# Altium PCB PCB1.PcbDoc
Units mm, origin at the board's own origin, x right, y up, seen from the top; angles counter-clockwise.
Board outline 80 x 85 mm, 2 copper layers (Top Layer, Bottom Layer); 33 components, 43 nets, 169 pads, 2 vias.
Unrouted connection lines stored in the file: 99.
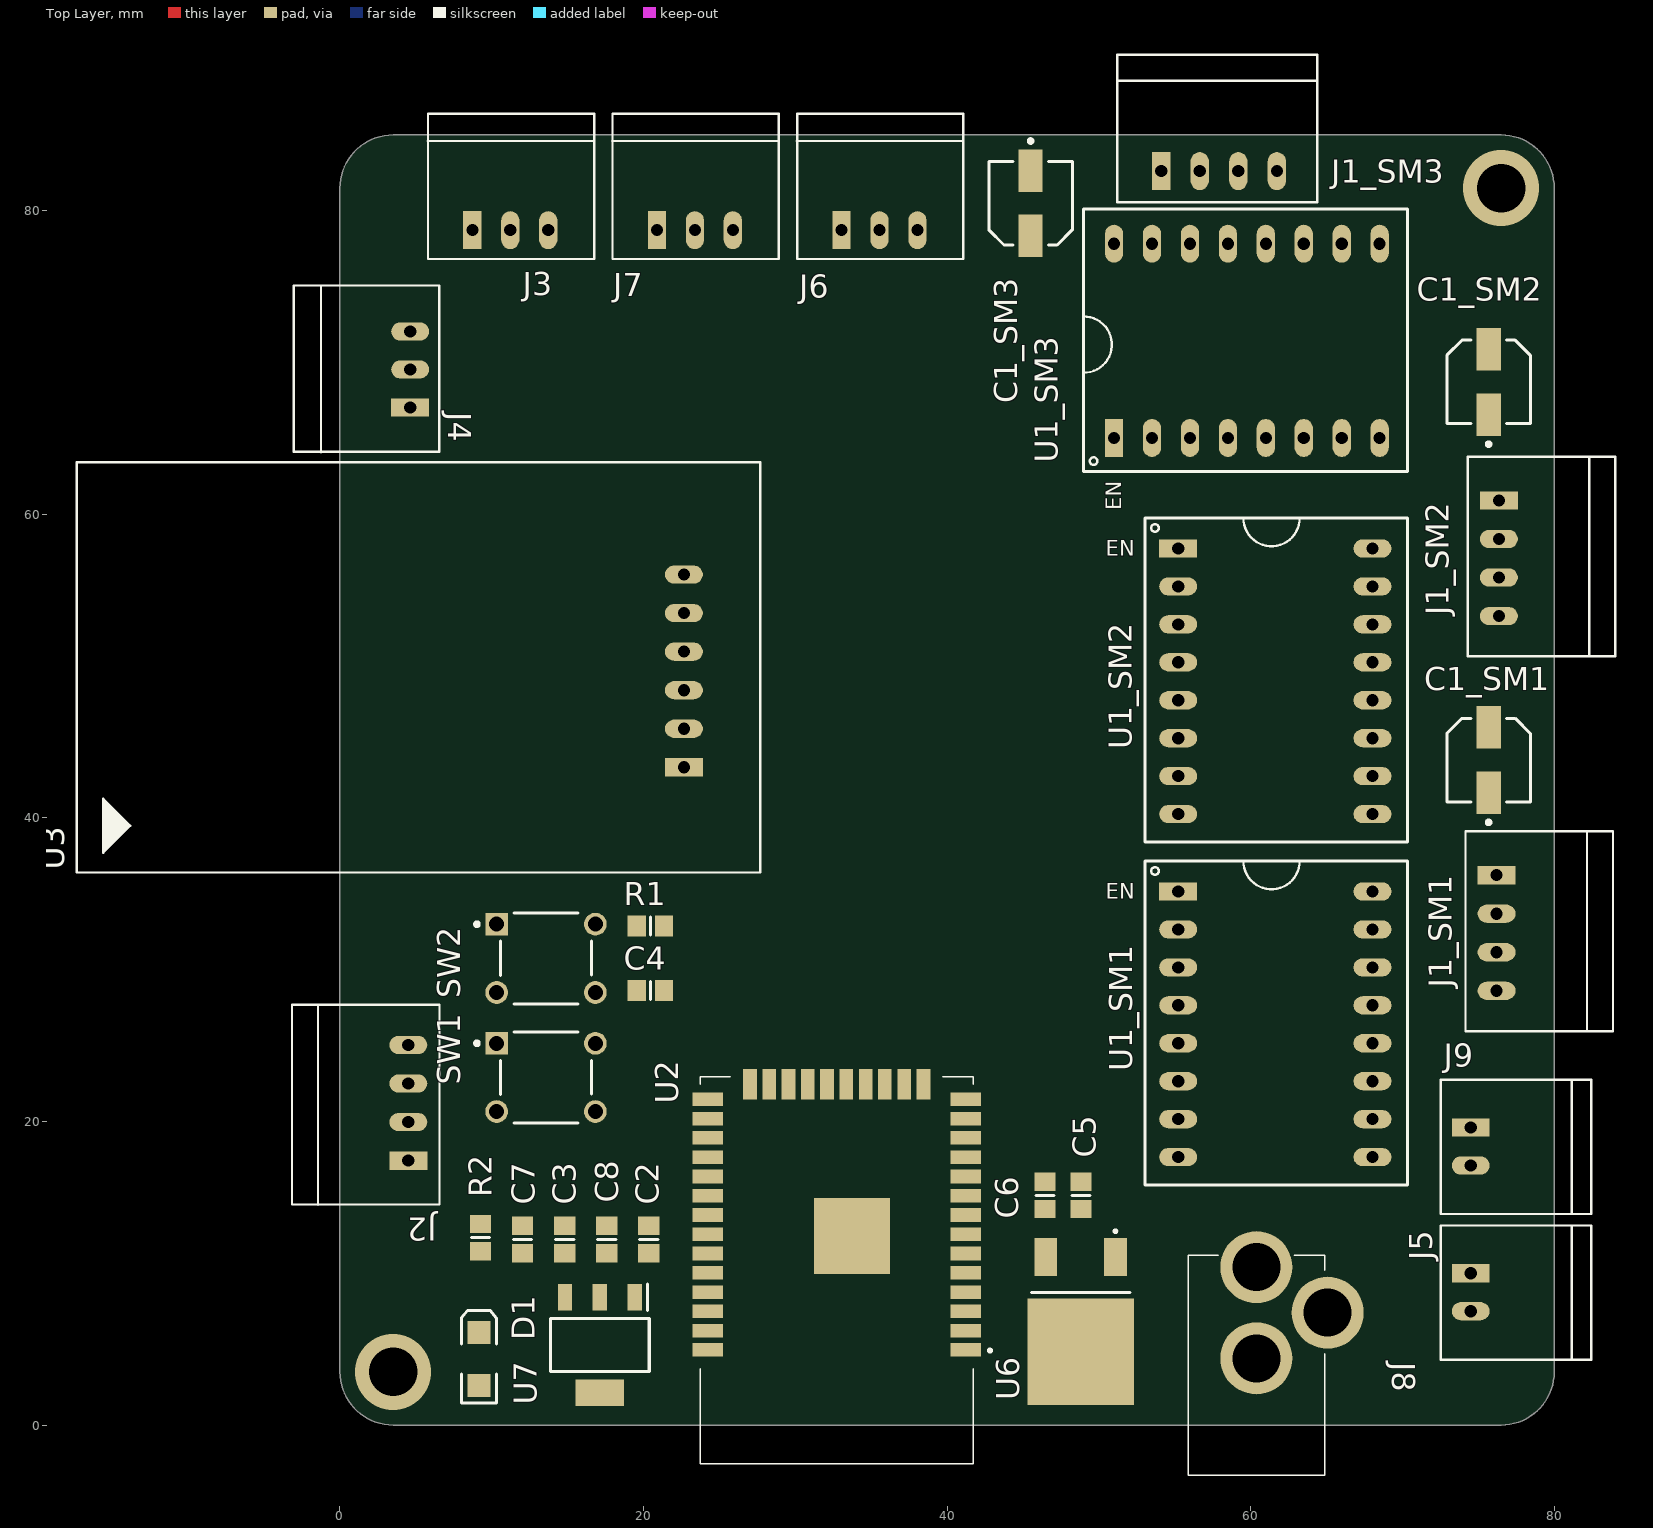
[diagram p0: Top Layer view]
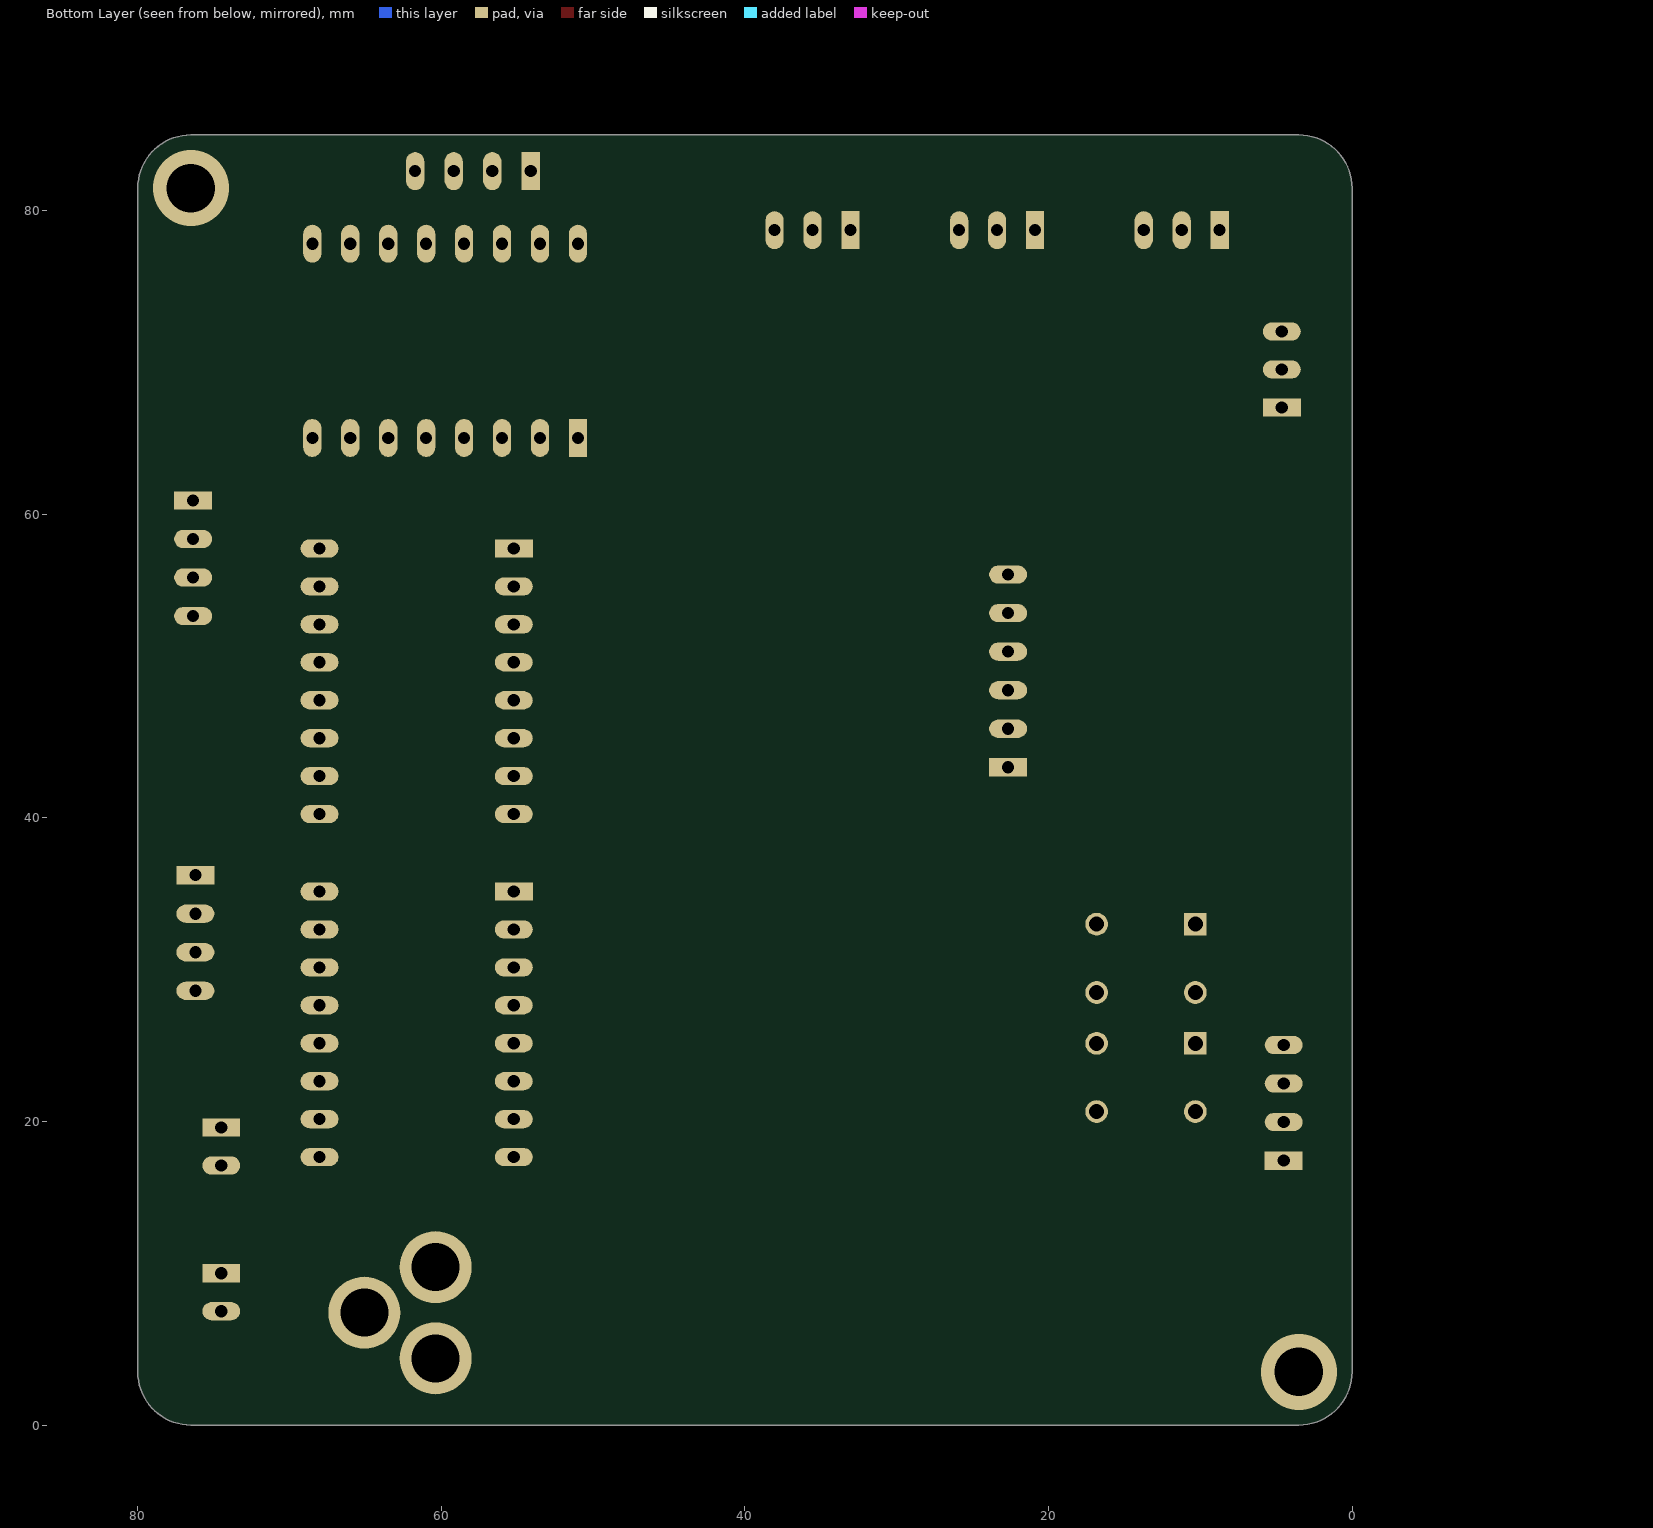
[diagram p1: Bottom Layer view, seen from below]

## Layer stack, top to bottom
Top Solder: solder mask 0.0102, Solder Resist, Dk 3.5
Top Layer: signal copper 0.0356
Dielectric 1: dielectric 0.32, FR-4, Dk 4.8
Bottom Layer: signal copper 0.0356
Bottom Solder: solder mask 0.0102, Solder Resist, Dk 3.5

## Board outline
0,3.5 0,81.5 cw(c3.5,81.5) 3.5,85 76.5,85 cw(c76.5,81.5) 80,81.5 80,3.5 cw(c76.5,3.5) 76.5,0 3.5,0 cw(c3.5,3.5)

## Design rules (kind name [scope] priority, off if disabled: settings)
Clearance [All] p1: gap=0.254 ignorepadtopadclearanceinfootprint=FALSE except(0: Arc-Hole Track-Hole SMDPad-Hole THPad-Hole Via-Hole Fill-Hole Poly-Hole Region-Hole Text-Hole)
PolygonConnect [All] p1: connectstyle=Relief reliefconductorwidth=0.254 reliefentries=4 polygonreliefangle="90 Angle" airgapwidth=0.254
RoutingVias [All] p1: holewidth=0.711 width=1.27 viastyle="Through Hole" minholewidth=0.711 minwidth=1.27 maxholewidth=0.711 maxwidth=1.27
SolderMaskExpansion [All] p1: expansion=0.102 istentingtop=FALSE
Width [All] p1: maxlimit=0.254 minlimit=0.254 preferedwidth=0.254
30 further rules are at their usual default settings.

## Classes and differential pairs
channel class SM1: SM1 SM2 SM3
component class SM3: C1_SM3 J1_SM3 U1_SM3
component class SM2: C1_SM2 J1_SM2 U1_SM2
component class Sheet: C2 C3 C4 C5 C6 C7 C8 D1 J2 J3 J4 J5 J6 J7 J8 J9 R1 R2 SW1 SW2 U2 U3 U6 U7
component class SM1: C1_SM1 J1_SM1 U1_SM1

## Components (designator, comment, footprint, x,y, rotation, side; value= is the part's Value field where it differs from the comment)
C1_SM1 "100pF" FP-SC-MFG 75.679,43.81 r90 top (schematic designator C1)
C1_SM2 "100pF" FP-SC-MFG 75.679,68.725 r90 top (schematic designator C1)
C1_SM3 "100pF" FP-SC-MFG 45.5,80.5 r270 top (schematic designator C1)
C2 "Cap Pol1" 6-0805_N 20.35,12.225 r90 top value=100pF
C3 "Cap Pol1" 6-0805_N 14.8,12.225 r90 top value=100pF
C4 "Cap Pol1" 6-0805_N 20.45,28.625 r0 top value=100pF
C5 "Cap Pol1" 6-0805_N 48.825,15.125 r90 top value=22uF
C6 "Cap Pol1" 6-0805_N 46.45,15.125 r90 top value=0.1uF
C7 "Cap Pol1" 6-0805_N 12.025,12.225 r90 top value=10uF
C8 "Cap Pol1" 6-0805_N 17.575,12.225 r90 top value=10uF
D1 "LED2" 3.2X1.6X1.1 9.15,4.35 r90 top
J1_SM1 "connector" JST_4P 76.204,36.23 r0 top (schematic designator J1)
J1_SM2 "connector" JST_4P 76.354,60.92 r0 top (schematic designator J1)
J1_SM3 "connector" JST_4P 54.105,82.616 r90 top (schematic designator J1)
J2 "connector" TTL 4.5,17.42 r180 top
J3 "Sharp IR" SHARP_IR 8.72,78.725 r90 top
J4 "Sharp IR" SHARP_IR 4.625,67.05 r180 top
J5 "FAN" JST_2P 74.5,10 r0 top
J6 "Endstop" ENDSTOP 33.045,78.725 r90 top
J7 "Endstop" ENDSTOP 20.882,78.725 r90 top
J8 "DC_JACK" DC_JACK 60.375,10.4 r270 top
J9 "PWR_SW" JST_2P 74.5,19.6 r0 top
R1 "Res1" 6-0805_N 20.45,32.875 r0 top value=1K
R2 "Res1" 6-0805_N 9.25,12.35 r270 top value=1K
SW1 "1825910-6" TECO-1825910-6_V 13.573,22.9 r0 top
SW2 "1825910-6" TECO-1825910-6_V 13.573,30.75 r0 top
U1_SM1 "Stepper Motor Driver" A4988 55.225,35.154 r0 top (schematic designator U1)
U1_SM2 "Stepper Motor Driver" A4988 55.225,57.754 r0 top (schematic designator U1)
U1_SM3 "Stepper Motor Driver" A4988 51,65.035 r90 top (schematic designator U1)
U2 "esp32" ESP_SoC_Module 41.225,4.95 r180 top
U3 "SD card" SD_MODULE 22.658,43.335 r180 top
U6 "LM7805" LM7805 48.8,7.95 r180 top
U7 "LM1117_3V3" LM1117_3V3 19.425,8.425 r270 top

## Footprints (in the part's own frame and the unit in brackets; to place one, negate y for a bottom-side part, rotate by r counter-clockwise, add the part's x,y. Pads: shape width x height; smd on the part's side, far side on the other; paste and mask are expansions set on the pad)
3.2X1.6X1.1 [mm] "SMT LED; 2 Flat Leads"
  rect 1.5x1.5 smd: 1(-1.75,0) 2(1.75,0)
  silkscreen extent -2.9,-1.15 3.2,1.15
6-0805_N [mm]
  rect 1.2x1.4 smd: 1(-0.9,0) 2(0.9,0)
  silkscreen extent 0,-0.6 0,0.6, body extent -1.07,-0.7 1.07,0.7, height 0.7
A4988 [mm]
  rect 2.5x1.2 hole 0.8: 1(0,0)
  oval 2.5x1.2 hole 0.8: 2(0,-2.5) 3(0,-5) 4(0,-7.5) 5(0,-10) 6(0,-12.5) 7(0,-15) 8(0,-17.5) 9(12.8,-17.5) 10(12.8,-15) 11(12.8,-12.5) 12(12.8,-10) 13(12.8,-7.5) 14(12.8,-5) 15(12.8,-2.5) 16(12.8,0)
  silkscreen extent -2.2,-19.33 15.1,2.03, body extent -1.22,-18.8 14.02,1.52, height 5.09
DC_JACK [mm]
  round 4.743 hole 3.162: 1(0,0) 2(6,0) 3(3,4.7)
  silkscreen extent -0.8,-4.5 13.7,4.5, body extent -1.05,-4.34 13.45,5.21, height 11.25
ENDSTOP [mm]
  rect 2.5x1.2 hole 0.8: 1(0,0)
  oval 2.5x1.2 hole 0.8: 2(0,-2.5) 3(0,-5)
  silkscreen extent -1.91,-8.03 7.68,2.95, body extent -0.39,-7.5 7.25,2.5, height 5.91
ESP_SoC_Module [mm]
  rect 2x0.9 smd: 1(0,0) 2(0,-1.27) 3(0,-2.54) 4(0,-3.81) 5(0,-5.08) 6(0,-6.35) 7(0,-7.62) 8(0,-8.89) 9(0,-10.16) 10(0,-11.43) 11(0,-12.7) 12(0,-13.97) 13(0,-15.24) 14(0,-16.51) 25(17,-16.51) 26(17,-15.24) 27(17,-13.97) 28(17,-12.7) 29(17,-11.43) 30(17,-10.16) 31(17,-8.89) 32(17,-7.62) 33(17,-6.35) 34(17,-5.08) 35(17,-3.81) 36(17,-2.54) 37(17,-1.27) 38(17,0)
  rect 0.9x2 smd: 15(2.785,-17.51) 16(4.055,-17.51) 17(5.325,-17.51) 18(6.595,-17.51) 19(7.865,-17.51) 20(9.135,-17.51) 21(10.405,-17.51) 22(11.675,-17.51) 23(12.945,-17.51) 24(14.215,-17.51)
  rect 5x5 smd: 39(7.5,-7.5)
  silkscreen extent -1.7,-18.01 17.5,7.49, body extent -0.5,-17.98 17.5,7.52, height 3.1
FP-SC-MFG [mm]
  rect 2.8x1.6 smd paste+0 mask+0: 1(-2.15,0) 2(2.15,0)
  silkscreen extent -4.22,-2.75 2.75,2.75, body extent -3.8,-3 3.8,3, height 0.25
JST_2P [mm]
  rect 2.5x1.2 hole 0.8: 1(0,0)
  oval 2.5x1.2 hole 0.8: 2(0,-2.5)
  silkscreen extent -1.97,-5.7 7.95,3.15, body extent -0.34,-4.97 7.3,2.53, height 5.91
JST_4P [mm]
  rect 2.5x1.2 hole 0.8: 1(0,0)
  oval 2.5x1.2 hole 0.8: 2(0,-2.54) 3(0,-5.08) 4(0,-7.62)
  silkscreen extent -2.05,-10.28 7.66,2.9, body extent -0.36,-9.98 7.27,2.53, height 5.91
LM1117_3V3 [mm]
  rect 1.75x0.95 smd: 1(0,0) 2(0,-2.3) 3(0,-4.6)
  rect 1.75x3.2 smd: 4(6.3,-2.3)
  silkscreen extent -0.88,-5.55 4.9,0.95, body extent -0.35,-5.55 6.65,0.95, height 1.68
LM7805 [mm]
  rect 1.5x2.5 smd: 1(-2.3,-3.125) 2(2.3,-3.125)
  rect 7x7 smd: 3(0,3.125)
  silkscreen extent -3.25,-4.91 3.25,-0.77, body extent -3.25,-3.89 3.25,5.61, height 2.3
SD_MODULE [mm]
  rect 2.5x1.2 hole 0.8: 1(0,0)
  oval 2.5x1.2 hole 0.8: 2(0,-2.54) 3(0,-5.08) 4(0,-7.62) 5(0,-10.16) 6(0,-12.7)
  silkscreen extent -5.02,-20.1 40,6.93, body extent -3.22,-18.38 38.58,5.63, height 5.63
SHARP_IR [mm]
  rect 2.5x1.2 hole 0.8: 1(0,0)
  oval 2.5x1.2 hole 0.8: 2(0,-2.5) 3(0,-5)
  silkscreen extent -1.91,-8.03 7.68,2.95, body extent -0.39,-7.5 7.25,2.5, height 5.91
TECO-1825910-6_V [mm] "Switch, 4-Leads, Body 5.99x5.99mm"
  rect 1.5x1.5 hole 0.99: 1(-3.25,2.25)
  round 1.5 hole 0.99: 2(3.25,2.25) 3(-3.25,-2.25) 4(3.25,-2.25)
  silkscreen extent -4.67,-2.99 2.99,3, body extent -3,-2.99 2.99,3, height 5
TTL [mm]
  rect 2.5x1.2 hole 0.8: 1(0,0)
  oval 2.5x1.2 hole 0.8: 2(0,-2.54) 3(0,-5.08) 4(0,-7.62)
  silkscreen extent -2.05,-10.28 7.66,2.9, body extent -0.36,-9.98 7.27,2.53, height 5.91

## Part data
C1_SM1 C1_SM2 C1_SM3: library part CMP-05427-000087-1, "CAP ALUM 10UF 20% 35V SMD", Capacitance=10uF, Case/Package=Radial, Leakage Current=3uA, Max Operating Temperature=85°C, Min Operating Temperature=-40°C, Package Quantity=1, Ripple Current=30mA, Tolerance=20%, Voltage=35V, Construction=Cylindrical, Contact Plating=Tin, Diameter=5mm, Height=5.4mm, Height - Seated (Max)=0.213inch, Lead Length=2.2mm, Lead Pitch=1.5mm, Length=5.5mm, Life (Hours)=2000Hour, Mount="Surface Mount", Number of Pins=2, Packaging="Tape and Reel", Radiation Hardening=No, REACH SVHC="No SVHC", Ripple Current (AC)=30mA, RoHS Compliant=Yes, Series=S, Termination=SMD/SMT, Voltage Rating=35V, Voltage Rating (DC)=35V, Width=5.3mm
C2 C3 C4 C5 C6 C7 C8: "Polarized Capacitor (Radial)", LatestRevisionDate=17-Jul-2002, LatestRevisionNote="Re-released for DXP Platform.", PackageDescription="Polarized Capacitor (Radial); 2 Leads", PackageReference=RB7.6-15, Published=8-Jun-2000, Publisher="Altium Limited"
D1: "Typical RED, GREEN, YELLOW, AMBER GaAs LED", LatestRevisionDate=17-Jul-2002, LatestRevisionNote="Re-released for DXP Platform.", PackageDescription="SM LED; 2 Flat Leads", PackageReference=3.2X1.6X1.1, PackageVersion=Feb-2002, Published=8-Jun-2000, Publisher="Altium Limited"
J1_SM1 J1_SM2 J1_SM3: library part JST_4P
J2: library part TTL
J3 J4: library part SHARP_IR
J5 J9: library part JST_2P
J6 J7: library part ENDSTOP
R1 R2: "Resistor", LatestRevisionDate=17-Jul-2002, LatestRevisionNote="Re-released for DXP Platform.", PackageDescription="Axial Device, Thru-Hole; 2 Leads; 0.3 in Pin Spacing", PackageReference=AXIAL-0.3, Published=8-Jun-2000, Publisher="Altium Limited"
SW1 SW2: library part CMP-1684-00021-1, "Tact Switch, SPST-NO, 0.05 A, -35 to 85 degC, 4-Pin THD, RoHS, Bulk", Actuator Color=Black, Contact Rating @ Voltage=0.05A@24VDC, Dielectric Strength=500VAC, Manufacturer="TE Connectivity", Maximum AC Voltage Rating=N/A, Maximum Contact Resistance=100mOhm, Maximum DC Voltage Rating=24V, Minimum Insulation Resistance=100MOhm, Operating Temperature=-35to85C, Package Description="4-Pin Through Hole Device, Body 5.99 x 5.99 mm, Pitch 6.5 mm", Package Reference=THD, Actuator Length=1.4mm, Actuator Material=PolybutyleneTerephthalate, Actuator Style=RoundButton, Base Material=N/A, Body Orientation=Straight, Bushing Type=Unthreaded, Contact Material=CopperAlloy, Contact Plating=Silver, Datasheet URL=http://www.te.com/commerce/DocumentDelivery/DDEController?Action=showdoc&DocId=Customer+Drawing%7F1825910%7FC9%7Fpdf%7FEnglish%7FENG_CD_1825910_C9.pdf%7F1825910-6, Datasheet Version="Rev. C9", Dimension=5.99x5mm, Electrical Life=100000Cycles, Family=1825910, Function=MomentaryContact, Housing Material=N/A, Illumination=N/R, Manufacturer URL=http://www.te.com, Mechanical Life=100000Cycles, Mounting=ThroughHole, Packaging=N/A, Part No=1825910-6, Pole Throw Configuration=SPST, Product Weight=N/A, RoHS=Yes, Seal Description=N/A, Seal Location=N/A, Switch Configuration=OFF(ON), Terminal Type=PCPins, Thread Size=N/R
U1_SM1 U1_SM2 U1_SM3: library part A4988
U2: library part ESP_SoC_Module
U3: library part SD_MODULE

## Via types
v1: diameter 5, hole 3.2, Top Layer to Bottom Layer, 2 vias

## Nets (pads, with @x,y where several pads share a name; then routed paths per layer and width w, separated by ;. In a path a pad name is that pad's centre, name@x,y a point inside that pad or via, vN(x,y) a via of type N, cw(c..) or ccw(c..) an arc to the next point about the centre after c; other vN are vias at no path point)
+3V3: C2.1 C3.1 C8.1 U2.2 U7.2
+5: C6.1 C7.1 D1.1 J2.1 J3.1 J4.1 J6.1 J7.1 U1_SM1.10 U1_SM2.10 U1_SM3.10 U3.2 U6.2 U7.3
+12: C1_SM1.2 C1_SM2.2 C1_SM3.2 C5.1 J5.1 J9.2 U1_SM1.16 U1_SM2.16 U1_SM3.16 U6.1
CS_SD: U2.29 U3.6
DIR1: U1_SM1.8 U2.6
DIR2: U1_SM2.8 U2.9
DIR3: U1_SM3.8 U2.12
EN1: U1_SM1.1 U2.8
EN2: U1_SM2.1 U2.11
EN3: U1_SM3.1 U2.14
ES_1: J6.3 U2.28
ES_2: J7.3 U2.27
GND: C1_SM1.1 C1_SM2.1 C1_SM3.1 C2.2 C3.2 C4.2 C5.2 C6.2 C7.2 C8.2 J2.4 J3.2 J4.2 J5.2 J6.2 J7.2 J8.2 R2.1 SW1.2 SW2.3 U1_SM1.9 U1_SM1.15 U1_SM2.9 U1_SM2.15 U1_SM3.9 U1_SM3.15 U2.1 U2.15 U2.38 U2.39 U3.1 U6.3 U7.1 U7.4
MISO: U2.31 U3.3
MOSI: U2.37 U3.4
NetC4_1: C4.1 R1.1 SW1.4
NetD1_2: D1.2 R2.2
NetJ1_SM1_1: J1_SM1.1 U1_SM1.14
NetJ1_SM1_2: J1_SM1.2 U1_SM1.13
NetJ1_SM1_3: J1_SM1.3 U1_SM1.12
NetJ1_SM1_4: J1_SM1.4 U1_SM1.11
NetJ1_SM2_1: J1_SM2.1 U1_SM2.14
NetJ1_SM2_2: J1_SM2.2 U1_SM2.13
NetJ1_SM2_3: J1_SM2.3 U1_SM2.12
NetJ1_SM2_4: J1_SM2.4 U1_SM2.11
NetJ1_SM3_1: J1_SM3.1 U1_SM3.14
NetJ1_SM3_2: J1_SM3.2 U1_SM3.13
NetJ1_SM3_3: J1_SM3.3 U1_SM3.12
NetJ1_SM3_4: J1_SM3.4 U1_SM3.11
NetJ8_1: J8.1 J9.1
NetR1_2: R1.2 U2.3
NetSW2_2: SW2.2 U2.24
NetU1_SM1_5: U1_SM1.5 U1_SM1.6
NetU1_SM2_5: U1_SM2.5 U1_SM2.6
NetU1_SM3_5: U1_SM3.5 U1_SM3.6
RXD: J2.2 U2.35
SCK: U2.30 U3.5
SHARP1: J3.3 U2.26
SHARP2: J4.3 U2.25
STEP1: U1_SM1.7 U2.7
STEP2: U1_SM2.7 U2.10
STEP3: U1_SM3.7 U2.13
TXD: J2.3 U2.34
pads on no net: J8.3 SW1.1 SW1.3 SW2.1 SW2.4 U1_SM1.2 U1_SM1.3 U1_SM1.4 U1_SM2.2 U1_SM2.3 U1_SM2.4 U1_SM3.2 U1_SM3.3 U1_SM3.4 U2.4 U2.5 U2.16 U2.17 U2.18 U2.19 U2.20 U2.21 U2.22 U2.23 U2.32 U2.33 U2.36
copper on no net:
  other v1: 3.5,3.5 76.5,81.5

## Silkscreen, mask and mechanical layers (free items; w line width, h text height)
Mechanical 1:
  lines w0.5: 0,3.5 ccw(c3.5,3.5) 3.5,0 ; 0,81.5 cw(c3.5,81.5) 3.5,85 ; 76.5,0 ccw(c76.5,3.5) 80,3.5 ; 76.5,85 cw(c76.5,81.5) 80,81.5
Mechanical 13:
  lines w0.5: 0,3.5 0,81.5 ; 3.5,0 76.5,0 ; 3.5,85 76.5,85 ; 80,3.5 80,81.5

## Text inside footprints (layer, text, board x,y; h text height)
U1_SM1: Top Overlay "EN" at 50.452,34.682 h1.02
U1_SM2: Top Overlay "EN" at 50.452,57.282 h1.02
U1_SM3: Top Overlay "EN" at 51.473,60.263 h1.02 r90